# EAGLE board 00A-051-A (EAGLE 6.3)
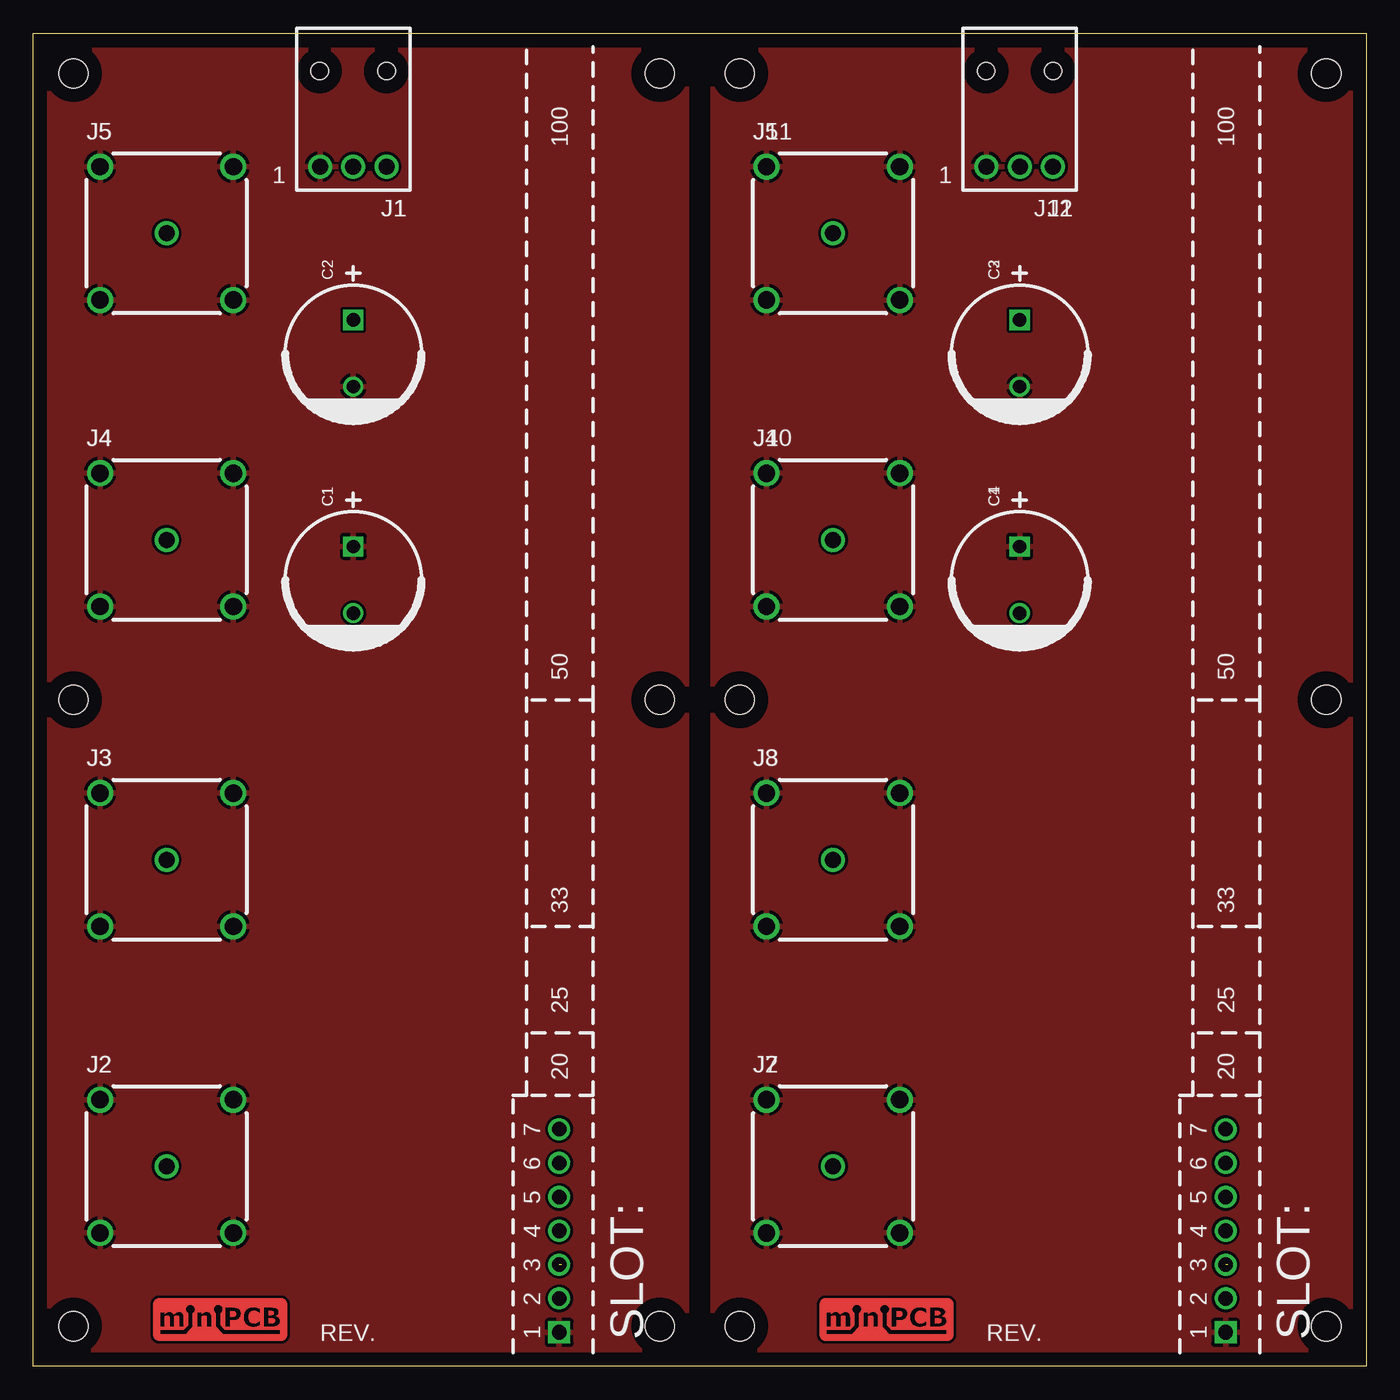
[diagram p0: board, top side]
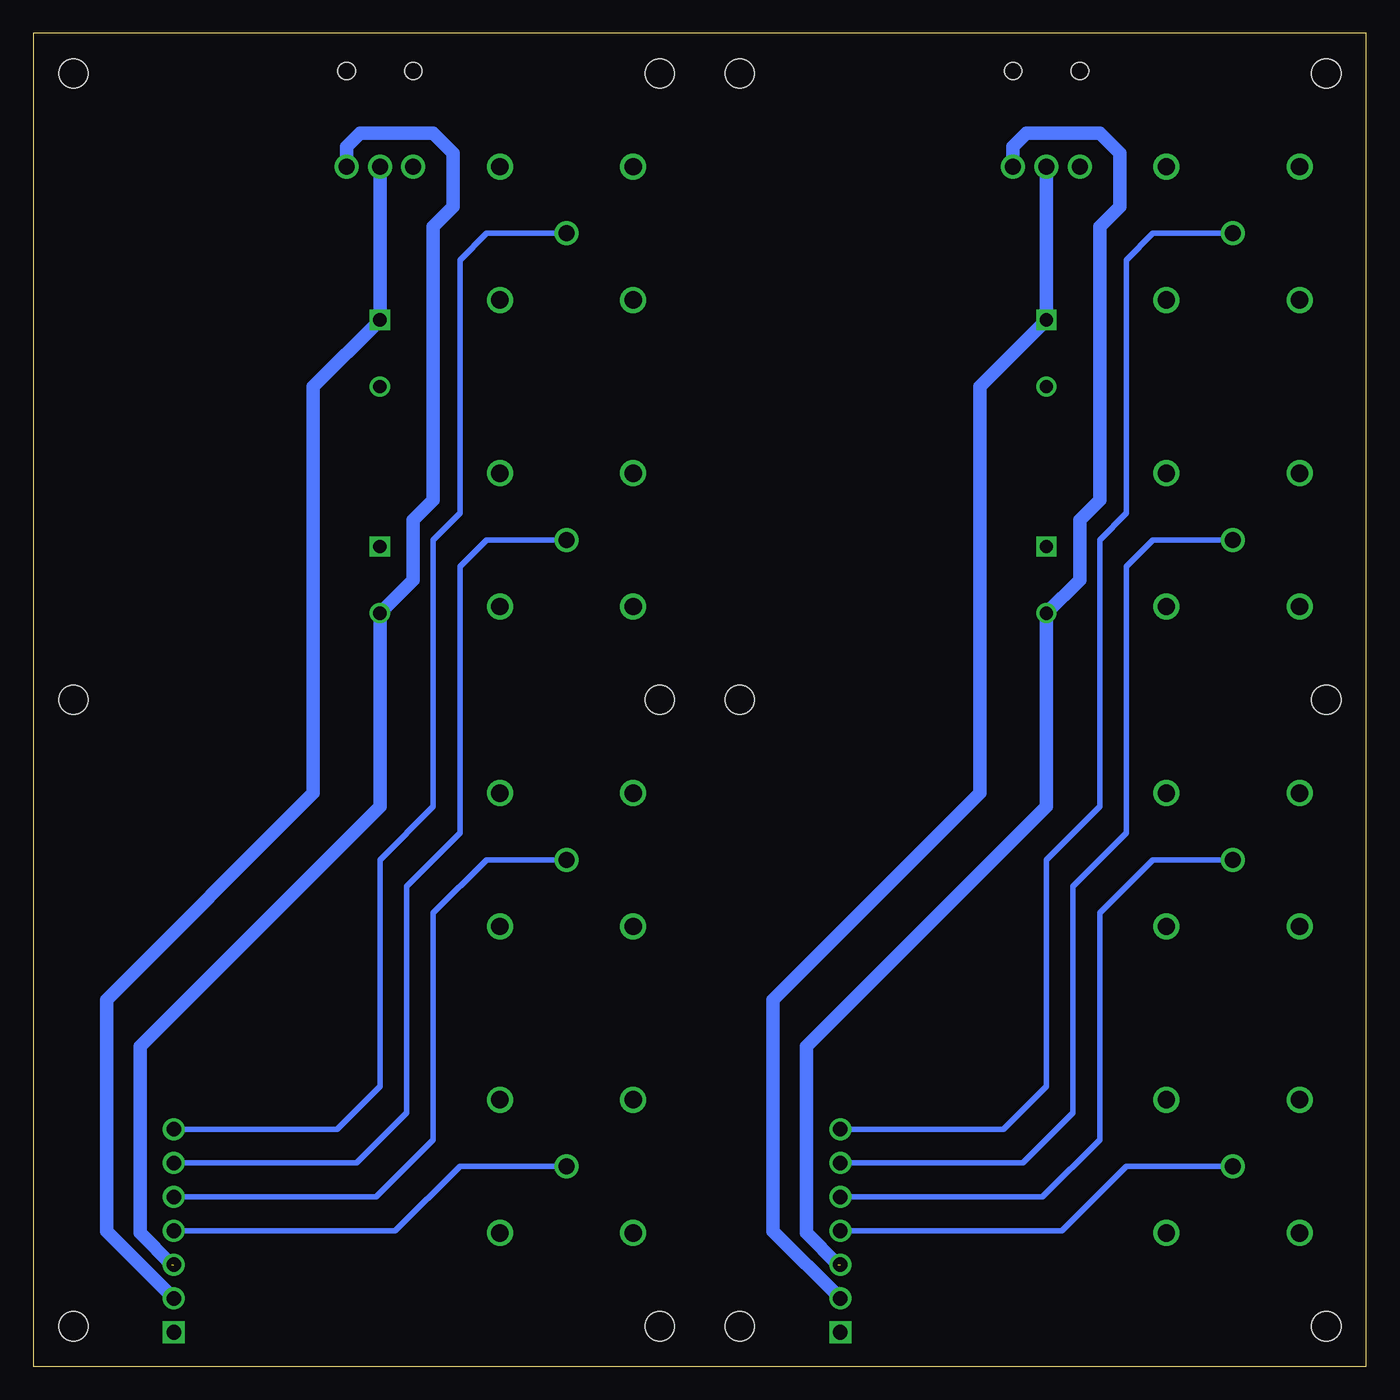
[diagram p1: board, bottom side, seen from below]

Size 100 x 100 mm. Coordinates in mm from the lower left corner, seen from the top.
Outline: 0,0 0,100 100,100 100,0 0,0
Copper layers (1*16): Top 0.035mm / dielectric 1.5mm / Bottom 0.035mm
Design rules "default": minimum track width 10mil, minimum drill 24mil, track to track 8mil, track to pad 8mil, pad to pad 8mil, via to via 8mil, smd to smd 8mil, copper to edge 40mil, drill to drill 8mil, minimum pad ring 10mil, minimum via ring 8mil, stop-mask expansion 4mil, vias tented up to drill 0mil, thermal gap 10mil
bRestrict: 2 lines

## Footprints (pad centres in the part's own frame; a part is rotated, then mirrored left to right if it is on the bottom)
C5MM = drill 1 square: + -2.5,0 | drill 1: - 2.5,0
PINS_3-NANOFIT-H = drill 1.2: 1 -2.5,0; 2 0,0; 3 2.5,0 | hole 1.3: -2.52,7.18; 2.5,7.18
B35N14H = drill 1.2: 1.SIG 0,0 | drill 1.3: 2.GND 5,5; 3.GND 5,-5; 4.GND -5,-5; 5.GND -5,5
MINIPCB_DOCK_7P = drill 1.1 square: 1 2.54,2.54 | drill 1.1: 2 5.08,2.54; 3 7.62,2.54; 4 10.16,2.54; 5 12.7,2.54; 6 15.24,2.54; 7 17.78,2.54
MINIPCB_DOCK_50X100 = hole 2.2: 3,97; 3,50; 3,3; 47,3; 47,50; 47,97

## Placement (x,y rotation side)
C1  [C5MM]  24,59 270 top
C2  [C5MM]  24,76 270 top
C3  [C5MM]  74,76 270 top
C4  [C5MM]  74,59 270 top
J1  NANOFIT-105313-1103  [PINS_3-NANOFIT-H]  24,90 0 top
J2  J5.4  [B35N14H]  10,15 0 top
J3  J5.5  [B35N14H]  10,38 0 top
J4  J5.5  [B35N14H]  10,62 0 top
J5  J5.5  [B35N14H]  10,85 0 top
J6  A  [MINIPCB_DOCK_7P]  42,0 90 top
J7  J5.4  [B35N14H]  60,15 0 top
J8  J5.5  [B35N14H]  60,38 0 top
J9  A  [MINIPCB_DOCK_7P]  92,0 90 top
J10  J5.5  [B35N14H]  60,62 0 top
J11  J5.5  [B35N14H]  60,85 0 top
J12  NANOFIT-105313-1103  [PINS_3-NANOFIT-H]  74,90 0 top
PCB  [MINIPCB_DOCK_50X100]  0,0 0 top
PCB1  [MINIPCB_DOCK_50X100]  50,0 0 top

## Library data of the parts
C1-C4 J1-J5 J7 J8 J10-J12 = minipcb
J6 J9 = minipcb; SLOT: A
PCB PCB1 = minipcb; PART_NUMBER: 00A-051; REVISION: A

## Nets
CH1: J2.1.SIG J6.4
CH2: J3.1.SIG J6.5
CH3: J4.1.SIG J6.6
CH4: J5.1.SIG J6.7
CH5: J7.1.SIG J9.4
CH6: J8.1.SIG J9.5
CH7: J9.6 J10.1.SIG
CH8: J9.7 J11.1.SIG
GND: C1.+ C2.- J1.1 J2.2.GND J2.3.GND J2.4.GND J2.5.GND J3.2.GND J3.3.GND J3.4.GND J3.5.GND J4.2.GND J4.3.GND J4.4.GND J4.5.GND J5.2.GND J5.3.GND J5.4.GND J5.5.GND J6.1
GND1: C3.- C4.+ J7.2.GND J7.3.GND J7.4.GND J7.5.GND J8.2.GND J8.3.GND J8.4.GND J8.5.GND J9.1 J10.2.GND J10.3.GND J10.4.GND J10.5.GND J11.2.GND J11.3.GND J11.4.GND J11.5.GND J12.1
V+: C2.+ J1.2 J6.2
V+1: C3.+ J9.2 J12.2
V-: C1.- J1.3 J6.3
V-1: C4.- J9.3 J12.3

## Tracks (layer width: path | path; a pad name or v marks a point on that pad's centre or on a via)
CH1
  Bottom 0.406: J2.1.SIG 18,15 22.84,10.16 J6.4
CH2
  Bottom 0.406: J3.1.SIG 16,38 20,34 20,17 24.3,12.7 J6.5
CH3
  Bottom 0.406: J4.1.SIG 16,62 18,60 18,40 22,36 22,19 25.76,15.24 J6.6
CH4
  Bottom 0.406: J5.1.SIG 16,85 18,83 18,64 20,62 20,42 24,38 24,21 27.22,17.78 J6.7
CH5
  Bottom 0.406: J7.1.SIG 68,15 72.84,10.16 J9.4
CH6
  Bottom 0.406: J8.1.SIG 66,38 70,34 70,17 74.3,12.7 J9.5
CH7
  Bottom 0.406: J10.1.SIG 66,62 68,60 68,40 72,36 72,19 75.76,15.24 J9.6
CH8
  Bottom 0.406: J11.1.SIG 66,85 68,83 68,64 70,62 70,42 74,38 74,21 77.22,17.78 J9.7
GND
  pour Top: 1,1 49,1 49,99 1,99
GND1
  pour Top: 51,1 99,1 99,99 51,99
V+
  Bottom 1.016: J1.2 C2.+ 29,73.5 29,43 44.5,27.5 44.5,10.12 J6.2
V+1
  Bottom 1.016: J12.2 C3.+ 79,73.5 79,43 94.5,27.5 94.5,10.12 J9.2
V-  (1 unrouted)
  Bottom 1.016: J1.3 26.5,91.5 25.5,92.5 20,92.5 18.5,91 18.5,87 20,85.5 20,65 21.5,63.5 21.5,59 C1.- 24,42 42,24 42,10 39.62,7.62
V-1  (1 unrouted)
  Bottom 1.016: J12.3 76.5,91.5 75.5,92.5 70,92.5 68.5,91 68.5,87 70,85.5 70,65 71.5,63.5 71.5,59 C4.- 74,42 92,24 92,10 89.62,7.62

## Text on the board
_tNames: J5 | J5 | J1 | J1 | C2 | C2 | J4 | J4 | C1 | C1 | J3 | J3 | J2 | J2